# Altium PCB LAN7800_USB_Ethernet_RevA.PcbDoc
Units mm, origin at the board's own origin, x right, y up, seen from the top; angles counter-clockwise.
Board outline 70 x 34 mm, 4 copper layers (Top Layer, GND_1, GND_2, Bottom Layer), stack 1.51 mm thick; 48 components, 41 nets, 196 pads, 73 vias.
Unrouted connection lines stored in the file: 1.
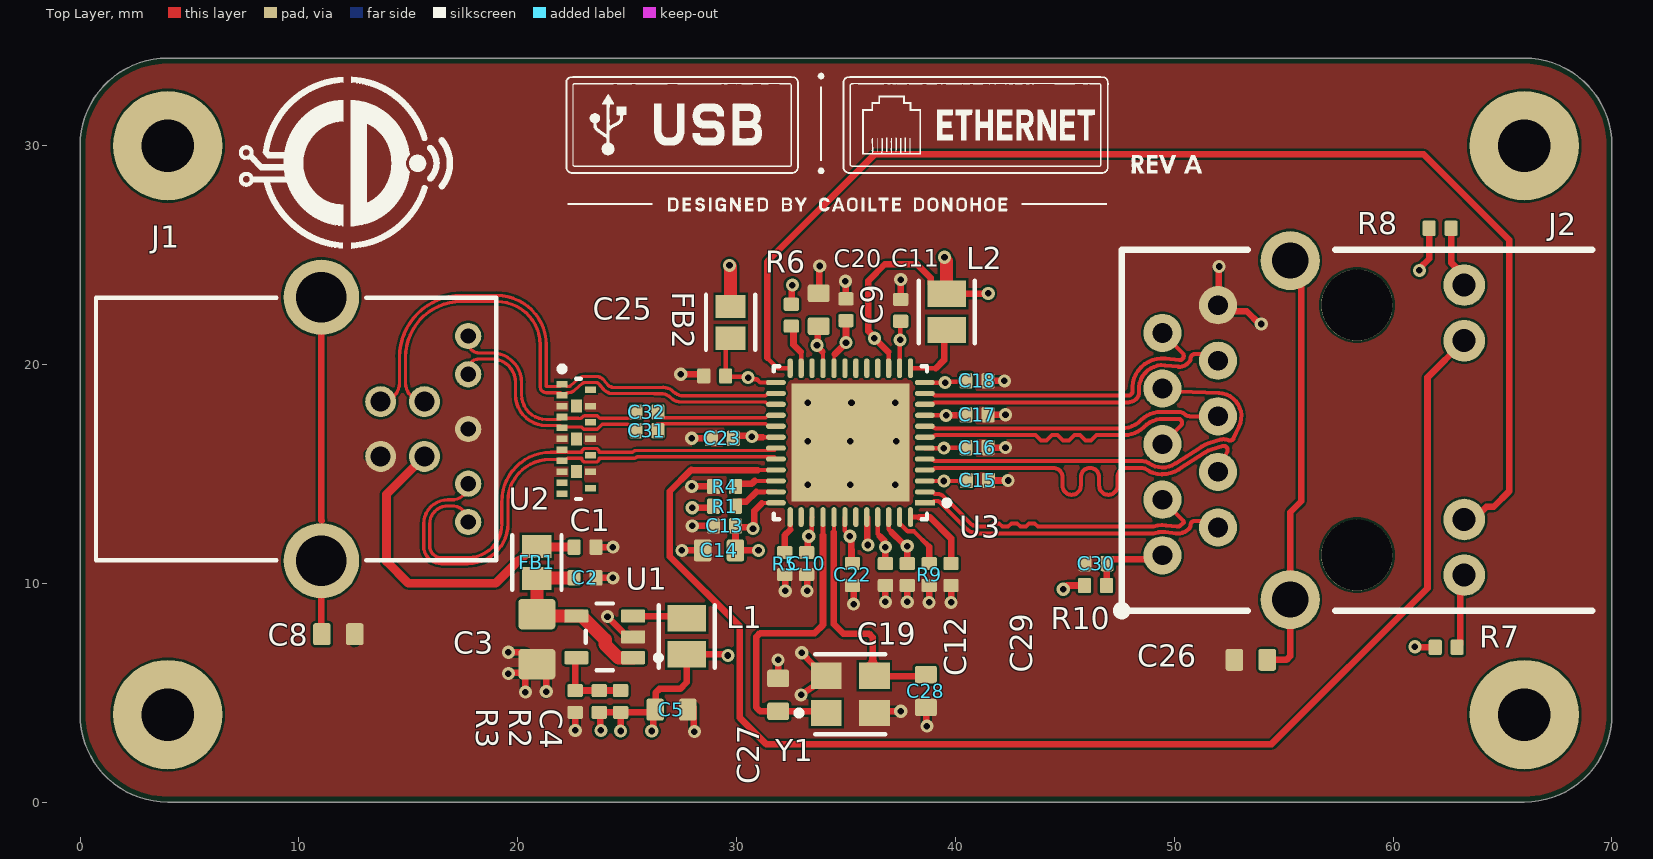
[diagram p0: Top Layer view]
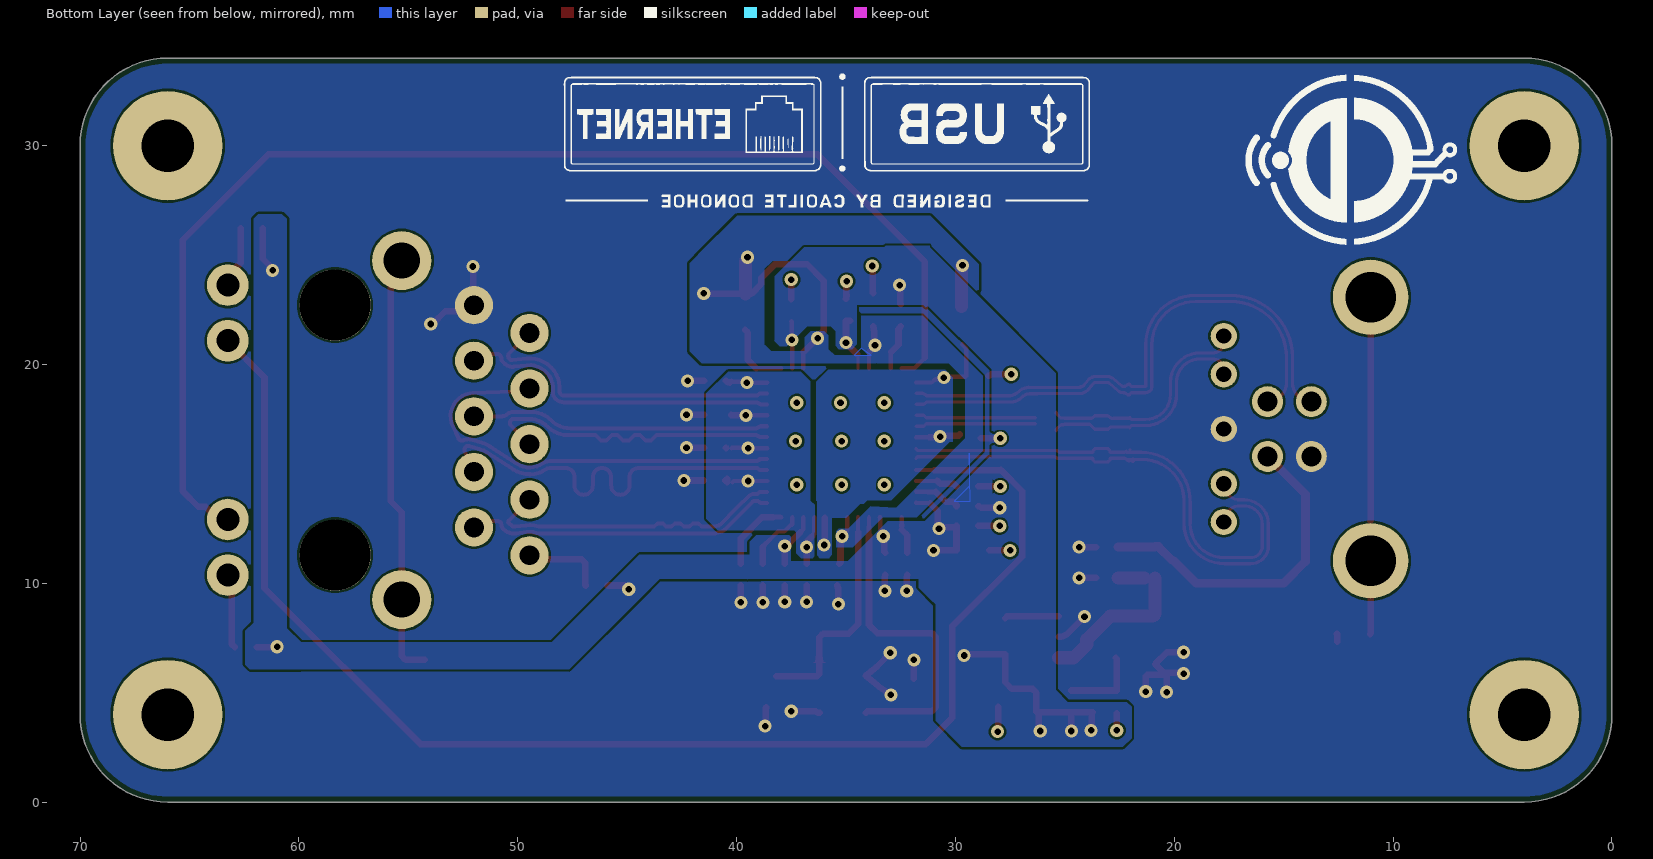
[diagram p1: Bottom Layer view, seen from below]
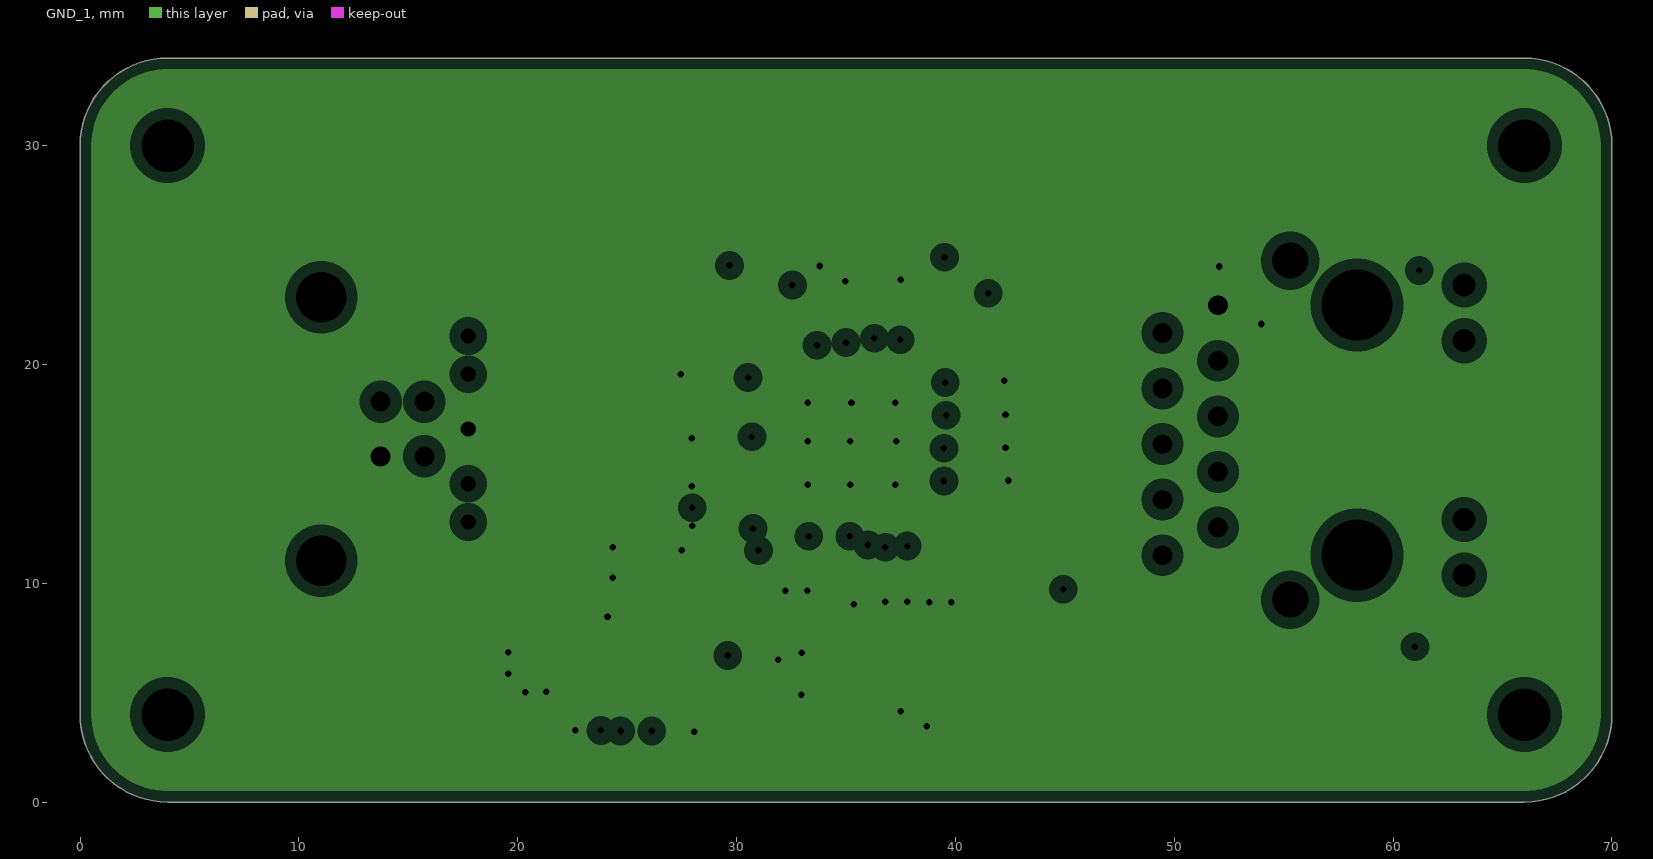
[diagram p2: GND_1, clearances drawn from the general rule]
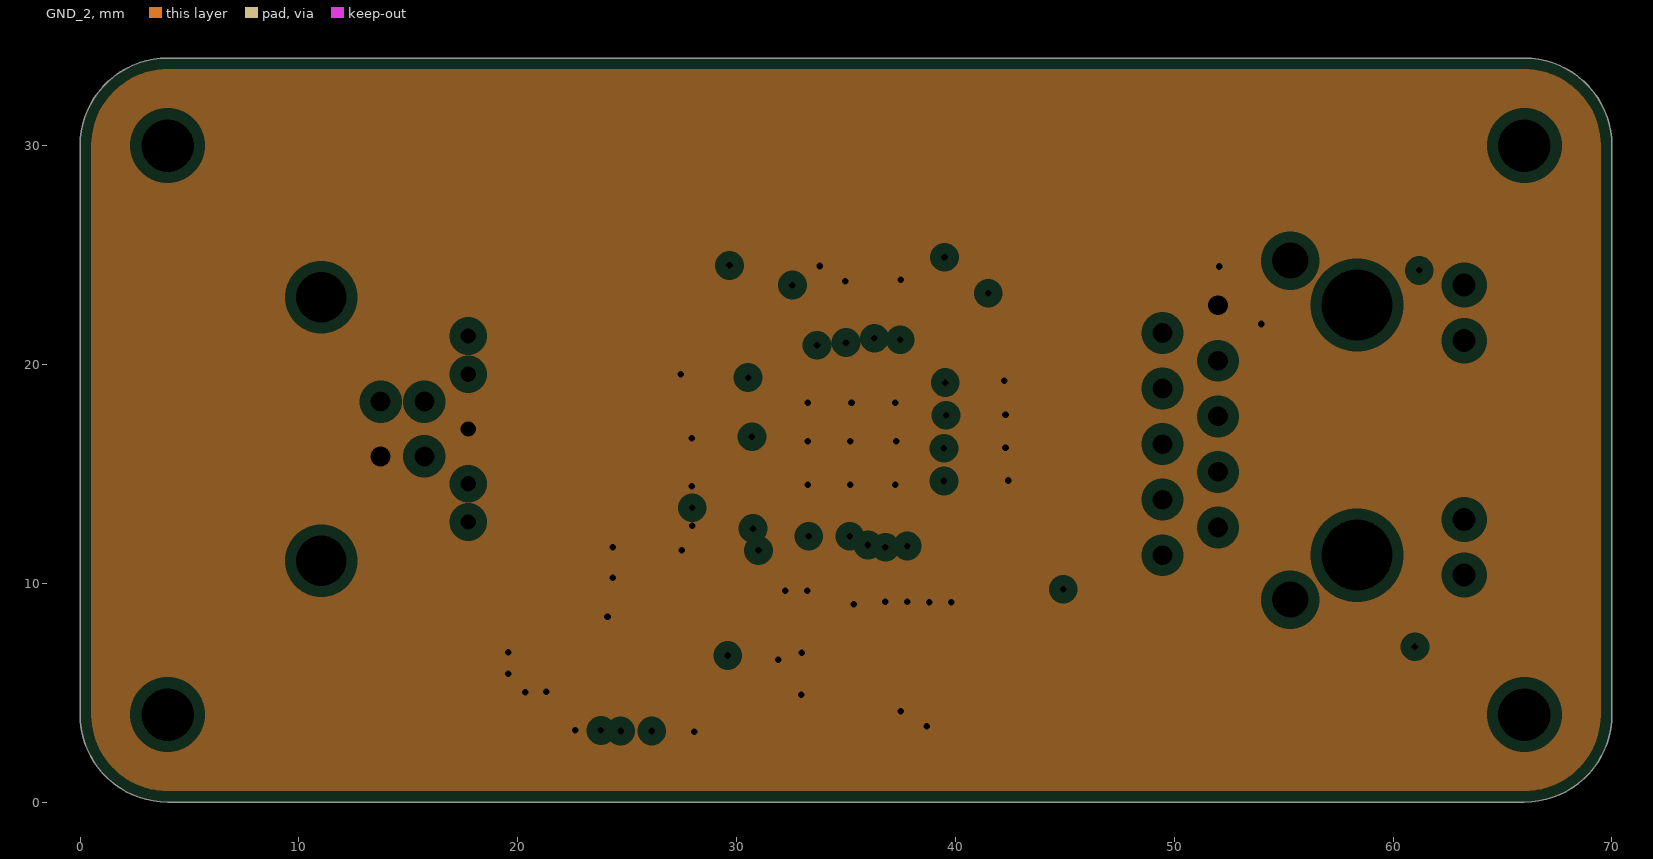
[diagram p3: GND_2, clearances drawn from the general rule]
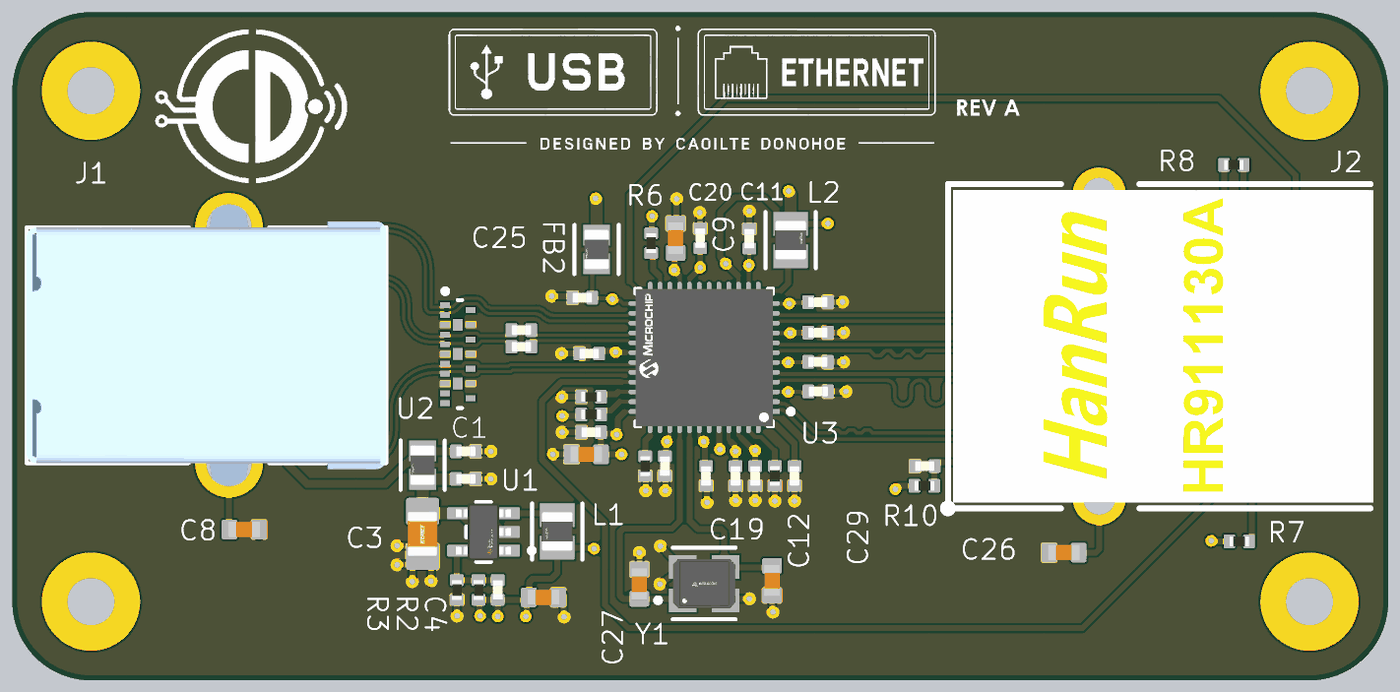
[diagram p4: 3D render of the assembled board from above, using the file's embedded part models]

## Layer stack, top to bottom
Top Solder: solder mask 0.01, Solder Resist, Dk 3.5
Top Layer: signal copper 0.035
Dielectric 2: prepreg 0.12, IS400, Dk 4.2
GND_1: plane copper 0.035, net GND
Dielectric 1: dielectric 1.13, IS400, Dk 4.4
GND_2: plane copper 0.035, net GND
Dielectric 3: prepreg 0.12, IS400, Dk 4.2
Bottom Layer: signal copper 0.035
Bottom Solder: solder mask 0.01, Solder Resist, Dk 3.5

## Board outline
0,4 0,30 cw(c4,30) 4,34 66,34 cw(c66,30) 70,30 70,4 cw(c66,4) 66,0 4,0 cw(c4,4)

## Design rules (kind name [scope] priority, off if disabled: settings)
BoardOutlineClearance [All] p1: gap=0.254 ignorepadtopadclearanceinfootprint=FALSE except(0: Arc-SplitContinuation Track-SplitContinuation SMDPad-SplitContinuation THPad-SplitContinuation Via-SplitContinuation Fill-SplitContinuation Poly-SplitContinuation Region-SplitContinuation Text-SplitContinuation)
Clearance CLEARANCE_USB_J1_BREAKOUT [InNetClass('USB2_HS') OR InNetClass('USB3_SS') vs IsPad And InComponent('U2')] p1: gap=0.08 ignorepadtopadclearanceinfootprint=FALSE
Clearance CLEARANCE_U2_USB_ESCAPE [InNetClass('USB3_SS') AND IsTrack vs InComponent('U2')] p2 off: gap=0.2 ignorepadtopadclearanceinfootprint=FALSE
Clearance CLEARANCE_SAME_DIFF_PAIR [All] p3 off: gap=0.127 ignorepadtopadclearanceinfootprint=FALSE
Clearance CLEARANCE_U2_PROTOTYPE [InComponent('U2') vs InComponent('U2')] p4 off: gap=0.1 ignorepadtopadclearanceinfootprint=FALSE
Clearance CLEARANCE_U3_FINE_PITCH [InComponent('U3') vs InComponent('U3')] p5 off: gap=0.15 ignorepadtopadclearanceinfootprint=FALSE
Clearance CLEARANCE_USB3_TO_OTHER_SIGNALS [InNetClass('USB3_SS') AND (IsTrack OR IsArc OR IsVia) vs Not InNetClass('USB3_SS') AND (IsTrack OR IsArc OR IsVia)] p6 off: gap=1.23 ignorepadtopadclearanceinfootprint=FALSE
Clearance CLEARANCE_ETH_BETWEEN_PAIRS [InDifferentialPairClass('ETH_DIFF') vs InDifferentialPairClass('ETH_DIFF')] p7 off: gap=0.635 ignorepadtopadclearanceinfootprint=FALSE
Clearance Clearance_1 [All] p8: gap=0.1 ignorepadtopadclearanceinfootprint=FALSE
DiffPairsRouting DP_USB2_D90 [InDifferentialPairClass('USB2_DIFF')] p1: maxlimit=0.127 minlimit=0.127 mostfreqgap=0.127 toplayer_minwidth=0.1 toplayer_maxwidth=0.246 toplayer_prefwidth=0.15 bottomlayer_minwidth=0.1 bottomlayer_maxwidth=0.246 bottomlayer_prefwidth=0.15 impedanceprofiledriven=TRUE impedanceprofileid={173104B4-F4B9-4A2C-8924-E43239866977} impedanceprofilevalue=90.000000 maxuncoupledlength=12.7
DiffPairsRouting DP_USB3_D90 [InDifferentialPairClass('USB3_DIFF')] p2: maxlimit=0.127 minlimit=0.127 mostfreqgap=0.127 toplayer_minwidth=0.1 toplayer_maxwidth=0.246 toplayer_prefwidth=0.15 bottomlayer_minwidth=0.1 bottomlayer_maxwidth=0.246 bottomlayer_prefwidth=0.15 impedanceprofiledriven=TRUE impedanceprofileid={173104B4-F4B9-4A2C-8924-E43239866977} impedanceprofilevalue=90.000000 maxuncoupledlength=12.7
DiffPairsRouting DP_ETH_D100 [InDifferentialPairClass('ETH_DIFF')] p3: maxlimit=0.127 minlimit=0.127 mostfreqgap=0.127 toplayer_minwidth=0.12 toplayer_maxwidth=0.184 toplayer_prefwidth=0.131 bottomlayer_minwidth=0.12 bottomlayer_maxwidth=0.184 bottomlayer_prefwidth=0.131 impedanceprofiledriven=TRUE impedanceprofileid={E3C815A3-BF4B-4A62-B495-158BF076C68E} impedanceprofilevalue=100.000000 maxuncoupledlength=0.127
HoleSize MIN_DRILLED_HOLE [All] p1: absolutevalues=TRUE maxlimit=6.35 minlimit=0.3 maxpercent=80.000 minpercent=20.000
MatchedLengths MATCH_ETH_BETWEEN_PAIRS [InDifferentialPairClass('ETH_DIFF')] p1: tolerance=10 checknetsindiffpair=FALSE checkdiffpairvsdiffpair=TRUE checkxsignals=TRUE checkothers=TRUE
MatchedLengths MATCH_ETH_WITHIN_PAIR [InDifferentialPairClass('ETH_DIFF')] p2: tolerance=1.27 checknetsindiffpair=TRUE checkdiffpairvsdiffpair=FALSE checkxsignals=FALSE checkothers=FALSE
MatchedLengths MATCH_USB3_WITHIN_PAIR [InDifferentialPairClass('USB3_DIFF')] p3: tolerance=1 checknetsindiffpair=TRUE checkdiffpairvsdiffpair=FALSE checkxsignals=FALSE checkothers=FALSE
MinimumAnnularRing MIN_ANNULAR_RING [All] p1: minimumring=0.15
MinimumSolderMaskSliver MIN_SOLDER_MASK_SLIVER [All] p1: minsoldermaskwidth=0.075
PlaneClearance [All] p1: clearance=0.508
PlaneConnect [All] p1: planeconnectstyle=Relief reliefexpansion=0.508 reliefentries=4 reliefconductorwidth=0.254 reliefairgap=0.254
PolygonConnect [All] p1: connectstyle=Direct reliefconductorwidth=0.254 reliefentries=4 polygonreliefangle="90 Angle" airgapwidth=0.254
RoutingLayers ROUTE_LAYER_USB3 [InNetClass('USB3_SS')] p1: top layer_v5=TRUE bottom layer_v5=FALSE
RoutingLayers ROUTE_LAYER_USB2 [InNetClass('USB2_HS')] p2: top layer_v5=TRUE bottom layer_v5=FALSE
RoutingLayers ROUTE_LAYER_ETH [InNetClass('ETH_MDI')] p3: top layer_v5=TRUE bottom layer_v5=FALSE
RoutingLayers ROUTE_LAYER_CLOCK [InNetClass('CLOCK_25MHZ')] p4: top layer_v5=TRUE bottom layer_v5=FALSE
RoutingLayers ROUTE_LAYER_GENERAL [All] p5: top layer_v5=TRUE bottom layer_v5=TRUE
RoutingVias VIA_POWER [InNetClass('POWER_VBUS') OR InNetClass('POWER_3V3') OR InNetClass('POWER_2V5') OR InNetClass('POWER_1V2')] p1: holewidth=0.4 width=0.8 viastyle="Through Hole" minholewidth=0.3 minwidth=0.6 maxholewidth=0.5 maxwidth=1
RoutingVias VIA_GENERAL [All] p2: holewidth=0.3 width=0.6 viastyle="Through Hole" minholewidth=0.3 minwidth=0.6 maxholewidth=0.3 maxwidth=0.6
SilkToSolderMaskClearance SILK_TO_MASK_CLEARANCE [All] p1: minsilkscreentomaskgap=0.1 clearancetoexposedcopper=TRUE
SolderMaskExpansion [All] p1: expansion=0.03 istentingtop=FALSE
SupplyNets "Schematic Supply Nets_8" [InNet('+3V3')] p1: voltage=0.000
SupplyNets "Schematic Supply Nets_7" [InNet('GNDE')] p2: voltage=0.000
SupplyNets "Schematic Supply Nets_6" [InNet('GNDU')] p3: voltage=0.000
SupplyNets "Schematic Supply Nets_5" [InNet('+1V2')] p4: voltage=0.000
SupplyNets "Schematic Supply Nets_4" [InNet('VBUSF')] p5: voltage=0.000
SupplyNets "Schematic Supply Nets_3" [InNet('GND')] p6: voltage=0.000
SupplyNets "Schematic Supply Nets_2" [InNet('+2V5')] p7: voltage=0.000
SupplyNets "Schematic Supply Nets_1" [InNet('+1V2A')] p8: voltage=0.000
SupplyNets "Schematic Supply Nets" [InNet('VBUS')] p9: voltage=0.000
Width WIDTH_LOW_CURRENT_SIGNALS [InNetClass('LOW_CURRENT_SIGNALS')] p1: maxlimit=0.3 minlimit=0.15 preferedwidth=0.2
Width WIDTH_3V3 [InNetClass('POWER_3V3')] p2: maxlimit=0.6 minlimit=0.15 preferedwidth=0.3 minimp=50.000000 maximp=50.000000 favimp=50.000000
Width WIDTH_SWITCH_NODES [InNetClass('SWITCH_NODES')] p3: maxlimit=1 minlimit=0.4 preferedwidth=0.6
Width WIDTH_VBUS [InNetClass('POWER_VBUS')] p4: maxlimit=1 minlimit=0.4 preferedwidth=0.6
Width WIDTH_1V2 [All] p5: maxlimit=1 minlimit=0.15 preferedwidth=0.2 minimp=50.000000 maximp=50.000000 favimp=50.000000
Width WIDTH_2V5 [InNetClass('POWER_2V5')] p6: maxlimit=0.3 minlimit=0.15 preferedwidth=0.2 minimp=50.000000 maximp=50.000000 favimp=50.000000
Width [All] p7: maxlimit=1 minlimit=0.15 preferedwidth=0.2 minimp=50.000000 maximp=50.000000 favimp=50.000000
23 further rules are at their usual default settings.

## Classes and differential pairs
differential pair class USB3_DIFF: USB3_RX USB3_TX USB3_TX_C
differential pair class USB2_DIFF: USB_D
net class LOW_CURRENT_SIGNALS: FB LED2 LED3 NetJ2_11 NetJ2_14 REF_FILT REF_REXT RESET SW VBUSDET VCC
net class POWER_VBUS: VBUS VBUSF
differential pair class ETH_DIFF: MDI_TR0 MDI_TR1 MDI_TR2 MDI_TR3
net class POWER_1V2: +1V2 +1V2A
net class POWER_2V5: +2V5
net class POWER_3V3: +3V3 VBUS VBUSF
net class CLOCK_25MHZ: XI XO
net class ETH_MDI: MDI_TR0_N MDI_TR0_P MDI_TR1_N MDI_TR1_P MDI_TR2_N MDI_TR2_P MDI_TR3_N MDI_TR3_P
net class USB3_SS: USB3_RX_N USB3_RX_P USB3_TX_C_N USB3_TX_C_P USB3_TX_N USB3_TX_P
net class USB2_HS: USB_D_N USB_D_P
component class 02_LAN7800_Controller: C9 C10 C11 C12 C13 C14 C16 C17 C18 C19 C20 C22 C23 C25 C26 C27 C28 C29 C30 C31 C32 FB2 J2 L2 R1 R4 R5 R6 R7 R8 R9 R10 U3 Y1
component class 01_USB_B_and_Power: C1 C2 C3 C4 C5 C8 FB1 J1 L1 R2 R3 U1 U2
differential pair USB3_RX: +USB3_RX_P -USB3_RX_N
differential pair USB3_TX: +USB3_TX_P -USB3_TX_N
differential pair USB_D: +USB_D_P -USB_D_N
differential pair USB3_TX_C: +USB3_TX_C_P -USB3_TX_C_N
differential pair D_MDI_TR0: +MDI_TR0_P -MDI_TR0_N
differential pair D_MDI_TR1: +MDI_TR1_P -MDI_TR1_N
differential pair D_MDI_TR2: +MDI_TR2_P -MDI_TR2_N
differential pair D_MDI_TR3: +MDI_TR3_P -MDI_TR3_N
differential pair MDI_TR3: +MDI_TR3_P -MDI_TR3_N
differential pair MDI_TR2: +MDI_TR2_P -MDI_TR2_N
differential pair MDI_TR1: +MDI_TR1_P -MDI_TR1_N
differential pair MDI_TR0: +MDI_TR0_P -MDI_TR0_N

## Components (designator, comment, footprint, x,y, rotation, side; value= is the part's Value field where it differs from the comment)
C1 "1uF" CAP_0402 23.075,11.65 r180 top
C2 "1uF" CAP_0402 23.075,10.25 r180 top
C3 "22uF" CAP_0805 20.875,7.45 r90 top
C4 "12pF" CAP_0402 24.7,4.6 r270 top
C5 "C0603" CAP_0603 27.025,4.225 r180 top
C8 "220pF" CAP_0603 11.8,7.675 r0 top
C9 "100nF" CAP_0402 35,22.5 r270 top
C10 "100nF" CAP_0402 33.2,10.9 r90 top
C11 "100nF" CAP_0402 37.5,22.475 r270 top
C12 "100nF" CAP_0402 37.8,10.4 r90 top
C13 "100nF" CAP_0402 29.45,12.625 r0 top
C14 "22uF" CAP_0603 29.2,11.5 r0 top
C15 "100nF" CAP_0402 41.01,14.698 r180 top
C16 "100nF" CAP_0402 40.99,16.2 r180 top
C17 "100nF" CAP_0402 40.99,17.7 r180 top
C18 "100nF" CAP_0402 40.99,19.25 r180 top
C19 "100nF" CAP_0402 36.8,10.4 r90 top
C20 "22uF" CAP_0603 33.75,22.5 r270 top
C22 "100nF" CAP_0402 35.3,10.4 r90 top
C23 "100nF" CAP_0402 29.35,16.625 r0 top
C25 "1uF" CAP_0402 29,19.475 r0 top
C26 "220pF" CAP_0603 53.5,6.5 r0 top
C27 "15pF" CAP_0603 31.9,4.9 r270 top
C28 "15pF" CAP_0603 38.65,5.075 r90 top
C29 "1uF" CAP_0402 39.8,10.4 r90 top
C30 "1uF" CAP_0402 46.425,10.9 r0 top
C31 "100nF" CAP_0402 25.9,16.975 r180 top
C32 "100nF" CAP_0402 25.9,17.825 r180 top
FB1 "BLM21PG221SN1D" FP-BLM21-0_2-t0_85-e0_5-IPC_C 20.875,10.95 r270 top
FB2 "220R@100MHz" FP-BLM21-0_2-t0_85-e0_5-IPC_C 29.725,21.925 r270 top
J1 "692221030100" 692221030100 9.875,17.05 r270 top
J2 "HR911130A" HR911130A 58.35,17 r270 top
L1 "LQM2MPN4R7MG0L" FP-LQM2MPN_G0-IPC_B 27.725,7.575 r270 top
L2 "LQM2MPN4R7MG0L" FP-LQM2MPN_G0-IPC_B 39.6,22.4 r90 top
R1 "12k" RES_0402 29.45,13.525 r180 top
R2 "53k6" RES_0402 23.725,4.6 r270 top
R3 "12k" RES_0402 22.625,4.6 r90 top
R4 "12k" RES_0402 29.45,14.425 r0 top
R5 "12k" RES_0402 32.2,10.9 r90 top
R6 "12k" RES_0402 32.5,22.25 r270 top
R7 "1k" RES_0402 62.425,7.075 r0 top
R8 "1k" RES_0402 62.15,26.225 r0 top
R9 "2k" RES_0402 38.8,10.4 r90 top
R10 "0R" RES_0402 46.4,9.9 r180 top
U1 "TLV62568DBVR" FP-DBV0005A-MFG 23.975,7.55 r180 top
U2 "ESD7008MUTAG" ONSC-UDFN-18-517BV_V 22.675,16.6 r0 top
U3 "LAN7800-I/Y9X" FP-48SQFN-5304-7x7B-IPC_B 35.2,16.426 r180 top
Y1 "ABM8G-25.000MHZ-B4Y-T" FP-ABM8G-MFG 35.2,4.925 r0 top

## Footprints (in the part's own frame and the unit in brackets; to place one, negate y for a bottom-side part, rotate by r counter-clockwise, add the part's x,y. Pads: shape width x height; smd on the part's side, far side on the other; paste and mask are expansions set on the pad)
692221030100 [mm] "USB 3.0 Type B Horizontal"
  round 1.42 hole 0.92: 1(1.25,5.86) 2(-1.25,5.86) 3(-1.25,3.86) 4(1.25,3.86)
  round 1.2 hole 0.7: 5(-4.25,7.86) 6(-2.5,7.86) 7(0,7.86) 8(2.5,7.86) 9(4.25,7.86)
  round 3.45 hole 2.3: Shell(-6.02,1.15) Shell(6.02,1.15)
  silkscreen extent -6,-9.15 6,9.15, body extent -7.2,-9.15 7.2,9.15, height 12.95
CAP_0402 [mm]
  rrect25% 0.6x0.7 smd: 1(-0.5,0) 2(0.5,0)
  body extent -0.5,-0.26 0.5,0.26, height 0.37
CAP_0603 [mm]
  rrect25% 0.8x1 smd: 1(-0.75,0) 2(0.75,0)
  body extent -0.8,-0.4 0.8,0.4, height 0.51
CAP_0805 [mm]
  rrect25% 1.4x1.7 smd: 1(-1.143,0) 2(1.143,0)
  body extent -1.15,-0.76 1.15,0.79, height 1.01
FP-48SQFN-5304-7x7B-IPC_B [mm]
  rect 0.91x0.239 smd paste+0 mask+0: 1(-3.401,2.75)
  rrect100% 0.91x0.239 smd paste+0 mask+0: 2(-3.401,2.25) 3(-3.401,1.75) 4(-3.401,1.25) 5(-3.401,0.75) 6(-3.401,0.25) 7(-3.401,-0.25) 8(-3.401,-0.75) 9(-3.401,-1.25) 10(-3.401,-1.75) 11(-3.401,-2.25) 12(-3.401,-2.75) 25(3.401,-2.75) 26(3.401,-2.25) 27(3.401,-1.75) 28(3.401,-1.25) 29(3.401,-0.75) 30(3.401,-0.25) 31(3.401,0.25) 32(3.401,0.75) 33(3.401,1.25) 34(3.401,1.75) 35(3.401,2.25) 36(3.401,2.75)
  rrect100% 0.239x0.91 smd paste+0 mask+0: 13(-2.75,-3.401) 14(-2.25,-3.401) 15(-1.75,-3.401) 16(-1.25,-3.401) 17(-0.75,-3.401) 18(-0.25,-3.401) 19(0.25,-3.401) 20(0.75,-3.401) 21(1.25,-3.401) 22(1.75,-3.401) 23(2.25,-3.401) 24(2.75,-3.401) 37(2.75,3.401) 38(2.25,3.401) 39(1.75,3.401) 40(1.25,3.401) 41(0.75,3.401) 42(0.25,3.401) 43(-0.25,3.401) 44(-0.75,3.401) 45(-1.25,3.401) 46(-1.75,3.401) 47(-2.25,3.401) 48(-2.75,3.401)
  rect 5.4x5.4 smd paste-1000 mask+0: 49(0,0)
  silkscreen extent -4.53,-3.5 3.5,3.5, body extent -4.11,-4.11 4.11,4.11, height 0.25
FP-ABM8G-MFG [mm]
  rect 1.4x1.2 smd paste+0 mask+0: 1(-1.1,-0.85) 2(1.1,-0.85) 3(1.1,0.85) 4(-1.1,0.85)
  silkscreen extent -2.47,-1.83 1.6,1.83, body extent -1.9,-1.55 1.9,1.55, height 0.25
FP-BLM21-0_2-t0_85-e0_5-IPC_C [mm]
  rect 1.055x1.356 smd paste+0 mask+0: 1(-0.726,0) 2(0.726,0)
  silkscreen extent -1.25,-1.12 1.25,1.12, body extent -1.35,-0.82 1.35,0.82, height 0.25
FP-DBV0005A-MFG [mm]
  rrect17% 1.1x0.6 smd paste+0 mask+0: 1(-1.3,0.95) 2(-1.3,0) 3(-1.3,-0.95) 4(1.3,-0.95) 5(1.3,0.95)
  silkscreen extent -2.58,-1.53 0.87,1.53, body extent -1.95,-1.78 1.95,1.78, height 0.25
FP-LQM2MPN_G0-IPC_B [mm]
  rect 1.206x1.758 smd paste+0 mask+0: 1(-0.826,0) 2(0.826,0)
  silkscreen extent -1.43,-1.28 1.43,1.28, body extent -1.68,-1.13 1.68,1.13, height 0.25
HR911130A [mm]
  round 1.75 hole 0.9: 1(5.72,-8.89) 2(4.45,-6.35) 3(3.18,-8.89) 4(1.91,-6.35) 5(0.64,-8.89) 6(-0.63,-6.35) 7(-1.9,-8.89) 8(-3.17,-6.35) 9(-4.44,-8.89) 10(-5.71,-6.35)
  round 1.9 hole 1.05: 11(6.625,4.9) 12(4.085,4.9) 13(-4.085,4.9) 14(-6.625,4.9)
  round 3.25 hole 3.25 unplated: MH(-5.715,0) MH(5.715,0)
  round 2.7 hole 1.65: SH(-7.745,-3.05) SH(7.745,-3.05)
  silkscreen extent -8.25,-10.95 8.45,10.75, body extent -7.94,-10.49 7.94,10.91, height 13.51
ONSC-UDFN-18-517BV_V [mm] "SON, 18-Leads, Body 5.5x1.5mm"
  rect 0.5x0.3 smd: 1(-0.65,2.5) 2(-0.65,2) 3(-0.65,1.5) 4(-0.65,1) 5(-0.65,0.5) 6(-0.65,0) 7(-0.65,-0.5) 8(-0.65,-1) 9(-0.65,-1.5) 10(-0.65,-2) 11(-0.65,-2.5) 12(0.65,-2.25) 13(0.65,-1.5) 14(0.65,-0.75) 15(0.65,0) 16(0.65,0.75) 17(0.65,1.5) 18(0.65,2.25)
  rect 0.5x0.6 smd: 19(0,1.5) 20(0,0) 21(0,-1.5)
  silkscreen extent -0.77,-2.75 0.21,3.32, body extent -0.75,-2.75 0.75,2.75, height 0.55
RES_0402 [mm]
  rrect25% 0.6x0.7 smd: 1(-0.5,0) 2(0.5,0)
  body extent -0.5,-0.25 0.5,0.25, height 0.3

## Part data
C1 C2 C4 C9 C10 C11 C12 C13 C15 C16 C17 C18 C19 C22 C23 C25 C29 C30 C31 C32: library part CAP_0402, "Capacitor SMD 0402"
C3: library part CAP_0805, "Capacitor SMD 0805"
C5 C8 C14 C20 C26 C27 C28: library part CAP_0603, "Capacitor SMD 0603"
FB1 FB2: library part CMP-0686-00610-3, "Chip Ferrite Bead, 0805, 220Ω @ 100MHz, 0.045Ω, 25%, 2A", Case Code (Imperial)=0805, Case Code (Metric)=2012, Current=2A, DC Resistance (DCR)=45mR, Frequency=100MHz, Max Operating Temperature=125°C, Min Operating Temperature=-55°C, Package Quantity=1, Tolerance=25%, Case/Package=0805, Contact Plating=Tin, Core Material=Ferrite, Current Rating=2A, DC Current=2A, DC Resistance-Max=45mR, Depth=1.25mm, Height=0.85mm, Impedance=220R, Lead Free="Lead Free", Length=2mm, Material=Ferrite, Max Current Rating=2A, Max DC Current=2A, Military Standard=Not, Number of Circuits=1, Number of Lines=1, Number of Pins=2, Packaging="Tape and Reel", Radiation Hardening=No, REACH SVHC="No SVHC", RoHS Compliant=Yes, Series=BLM21P, Shielding=Unshielded, Termination=SMD/SMT, Test Frequency=100MHz, Width=1.25mm
J1: library part CMP-1502-03224-3, "Conn USB 3.0 Type B RCP 9 POS (1.75mm/2.5)mm/1.25mm Solder RA Thru-Hole 9 Terminal 1 Port Tray", Color=Blue, Contact Resistance=50mΩ, Current Rating=250mA, Flammability Rating="UL94 V-0", Insulation Resistance=100MΩ, Max Operating Temperature=85°C, Min Operating Temperature=-20°C, Operating Supply Voltage=30V, Connector Type=USB, Contact Material="Nickel, Tin", Contact Plating=Gold, Features=Shielded, Gender=Receptacle, Height=13.05mm, Lead Free="Lead Free", Length=12mm, Mount="Horizontal, PCB, Through Hole", Number Of Contacts=9, Number of Pins=9, Number of Ports=1, Orientation=Horizontal, RoHS=Compliant, Termination="Through Hole", USB Standard="USB 3.0", Voltage Rating=30V, Voltage Rating (AC)=30V, Width=18.3mm
J2: "100/1000Base-T Magnetics Single-Port RJ45 Connector with Integrated Magnetics and LEDs", Manufacturer=Hanrun, Manufacturer Part Number=HR911130A
L1 L2: library part CMP-06042-016483-1, "Multilayer Type Inductor for Power Lines, 0806 (2016), 4.7μH, 20%, 0.175Ω, 1.1A", Case Code (Imperial)=0806, Case Code (Metric)=2016, Case/Package=0805, Current Rating=1.1A, DC Resistance (DCR)=175mR, Inductance=4.7uH, Max Operating Temperature=125°C, Min Operating Temperature=-55°C, Package Quantity=3000, Self Resonant Frequency=20MHz, Test Frequency=1MHz, Tolerance=20%, Core Material=Ferrite, DC Current=1.1A, Depth=1.75mm, Height=0.9mm, Height - Seated (Max)=0.039inch, Length=0.079inch, Max DC Current=1.1A, Military Standard=Not, Mount="Surface Mount", Packaging="Tape and Reel", RoHS Compliant=Yes, Shielding=Shielded, Termination=SMD/SMT, Weight=0.000353oz, Width=0.049inch
R1 R2 R3 R4 R5 R6 R7 R8 R9 R10: library part RES_0402, "Resistor SMD 0402"
U1: library part CMP-04918-000009-1, "IC REG BUCK ADJ 1A SOT23-5", Manufacturer="Texas Instruments", Max Junction Temp=+125°C, Max Supply Voltage=5.5V, Min Supply Voltage=2.5V, Nominal Supply Current=35uA, Output Current=1A, Output Voltage=0.6-5.5V, Package=DBV0005A, Switching Frequency=1.5MHz, Temperature="-40°C to +125°C", Temperature Range Low=-40°C, Automotive=No, Category=IC, ComponentLink2Description=Datasheet, ComponentLink2URL=http://www.ti.com/lit/ds/symlink/tlv62568.pdf, Device Class L1="Integrated Circuits (ICs)", Device Class L2="Power Management ICs", Device Class L3="Voltage Regulators - Switching", Digikey Description="IC REG BUCK ADJ 1A SOT23-5", Height=1.45mm, Lead Free=Yes, Manufacturer Part Number=TLV62568DBVR, Max Duty Cycle=100%, Mouser Description="1-A High Efficiency Synchronous Buck Converter, SMD, 5-pin SOT-23, T/R 3k", Number of Outputs=1, Octopart=https://octopart.com/tlv62568dbvr-texas+instruments-76926199, Output Type=AdjustableProgrammable, RoHS=TRUE, Standoff Height=0mm, Switching Topology=Buck, Temperature Range High=+125°C
U2: library part CMP-1063-00247-1, "Transient Voltage Suppressor, Low Capacitance ESD Protection for High Speed Data, 18-Pin UDFN, Pb-Free, Tape and Reel", Manufacturer="On Semiconductor", ComponentLink1Description="Manufacturer URL", ComponentLink1URL=http://www.onsemi.com/, ComponentLink2Description=Datasheet, ComponentLink2URL=http://www.onsemi.cn/pub_link/Collateral/ESD7008-D.PDF, ComponentLink3Description="Package Specification", ComponentLink3URL=http://www.onsemi.cn/pub_link/Collateral/517BV.PDF, DatasheetVersion="Rev. 4", Direction=Bidirectional, IR Max (uA)=1, Mounting Technology="Surface Mount", Number of Lines=8, PackageDescription="18-Pin Small Outline No-Lead, Body 5.5 x 1.5 mm", PackageReference=UDFN-18-517BV, PackageVersion="Rev. A, 12/2012", Packing="Tape and Reel", PartNumber=ESD7008MUTAG, RoHS=Pb-Free, V(BR) Min (V)=5.5, VRWM Max (V)=5
U3: library part CMP-06298-000014-1, "IC ETHERNET CTLR USB 48SQFN", Max Operating Temperature=85°C, Min Operating Temperature=-40°C, Operating Supply Current=4mA, Packaging=Tray
Y1: library part CMP-27762-000021-2, "Crystal 25MHz ±30ppm (Tol) ±30ppm (Stability) 10pF FUND 60Ω 4-Pin SMD T/R", Case/Package=CSMD, ESR (Equivalent Series Resistance)=60R, Frequency=25MHz, Frequency Stability=30ppm, Load Capacitance=10pF, Max Operating Temperature=70°C, Min Operating Temperature=-20°C, Operating Frequency="25 MHz", Package Quantity=1000, Depth=2.5mm, Frequency Tolerance=30ppm, Height=0.039inch, Lead Free="Lead Free", Length=3.2mm, Mount="Surface Mount", Number of Pins=4, Packaging="Tape and Reel", Series=ABM8G, Series Resistance=60R, Termination=SMD/SMT, Tolerance=30ppm, Width=0.098inch

## Free pads (board coordinates)
  round 5 hole 2.4: 1(4,30) 2(4,4) 3(66,30) 4(66,4)

## Via types
v1: diameter 0.6, hole 0.3, Top Layer to Bottom Layer, 73 vias

## Nets (pads, with @x,y where several pads share a name; then routed paths per layer and width w, separated by ;. In a path a pad name is that pad's centre, name@x,y a point inside that pad or via, vN(x,y) a via of type N, cw(c..) or ccw(c..) an arc to the next point about the centre after c; other vN are vias at no path point)
+1V2: C20.2 C22.2 FB2.1 L2.2 U3.15 U3.21 U3.42 | length 18.8
  Top Layer w0.2: 33.92,20.58 33.95,20.55 U3.21 ; U3.42 34.95,12.4 35.175,12.175 v1(35.175,12.15) ; 36.92,20.58 36.95,20.55 U3.15
  Top Layer w0.3: C20.2 33.7,21.5 33.7,20.8 33.92,20.58 ; v1(35.175,12.15) 35.232,12.093 35.232,11.543 35.25,11.525 35.25,10.95 C22.2 ; 36.92,20.58 v1(36.3,21.2) 36.3,21.251 36.025,21.526 36.025,23.825 36.775,24.575 38.251,24.575 38.871,23.955 38.871,23.679 39.324,23.226 L2.2 41.476,23.226 v1(41.5,23.25) ; v1(39.5,24.9) 39.5,24.819 v1@39.6,24.719
  Top Layer w0.6: v1(29.675,24.525) 29.725,24.475 FB2.1 ; L2.2 v1@39.6,24.719
  other v1: 33.675,20.875
+1V2A: C23.2 C25.2 FB2.2 U3.25 U3.30 U3.44 | length 7.3
  Top Layer w0.2: FB2.2@29.7,20.924 29.5,20.724 C25.2 29.538,19.437 30.488,19.437 v1(30.525,19.4) 30.602,19.323 30.927,19.323 31.075,19.175 31.076,19.176 U3.25 ; 31.2,16.675 U3.30 U3.30
  Top Layer w0.3: C23.2@29.8,16.8 29.85,16.75 30.65,16.75 v1(30.7,16.7) 30.725,16.675 31.2,16.675 ; U3.44@35.975,13 35.975,11.775 v1(36,11.75)
+2V5: C15.2 C16.2 C17.2 C18.2 C19.2 U3.3 U3.6 U3.9 U3.12 U3.45 | length 9.3
  Top Layer w0.2: U3.45 36.45,12.25 36.55,12.15 ; U3.3 v1@39.249,14.676 ; U3.6 38.602,16.175 v1(39.475,16.175) 39.488,16.188 40.208,16.188 C16.2@40.22,16.175 ; U3.9@38.602,17.676 v1@39.574,17.676 ; U3.12 38.609,19.169 v1(39.531,19.169) 39.572,19.209 40.067,19.209 40.204,19.209 C18.2@40.245,19.25 ; v1@39.25,14.675 v1@39.249,14.676 ; 40.188,14.624 40.137,14.675 v1(39.475,14.675) v1(39.475,14.675) v1@39.249,14.676
  Top Layer w0.3: 36.55,12.15 36.65,12.05 36.743,11.957 36.743,11.707 v1(36.8,11.65) C19.2 ; v1(39.575,17.675) 39.588,17.687 40.233,17.687 C17.2@40.245,17.7 ; C18.2@40.312,19.176 ccw(c40.312,19.428) C18.2 ; C15.2@40.433,14.624 C15.2@40.433,14.774 ; C15.2@40.435,14.773 C15.2 ; C16.2@40.465,16.175 C16.2
+3V3: C4.2 C5.2 C9.2 C10.2 C11.2 C12.2 C13.2 C14.2 L1.2 R1.2 R2.2 R6.1 R7.1 R8.1 R10.2 U3.14 U3.20 U3.36 U3.39 U3.46 | length 30.7
  Top Layer w0.15: U3.20 34.45,20.429 34.48,20.459
  Top Layer w0.2: 31.15,13.65 31.169,13.669 31.791,13.669 U3.36 ; v1(33.3,12.15) 33.3,12.258 33.442,12.401 33.442,13.017 U3.39 ; U3.46 36.95,12.466 37.083,12.333 ; U3.14 37.458,19.835 37.458,21.108 37.487,21.137 37.487,21.962 C11.2
  Top Layer w0.3: R2.2 C5.2@26.275,4.1 ; R2.2@23.762,4.037 23.762,3.312 v1(23.8,3.275) ; v1(24.7,3.25) 24.7,3.275 C4.2@24.7,4.075 ; v1(26.125,3.25) 26.182,3.307 26.182,4.082 C5.2@26.157,4.107 ; C5.2@26.3,4.125 26.3,4.999 26.476,5.175 27.425,5.175 27.725,5.475 L1.2 29.551,6.749 v1(29.6,6.7) ; v1(27.975,13.45) 28.8,13.45 R1.2 ; v1(31,11.5) C14.2 C13.2 30.018,12.557 30.693,12.557 v1(30.75,12.5) 30.807,12.557 30.807,13.307 31.15,13.65 ; R6.1 32.525,22.775 32.525,23.6 v1(32.55,23.625) ; C10.2 33.25,11.45 33.25,12.1 v1(33.3,12.15) ; 34.48,20.459 35,20.979 v1(35,21) C9.2 C9.2@34.8,21.992 ; 37.083,12.333 37.566,11.85 37.569,11.85 37.719,11.7 v1(37.8,11.7) C12.2 ; v1(44.925,9.725) 45.1,9.9 R10.2 ; v1(61,7.1) 61.025,7.075 R7.1 ; v1(61.2,24.3) 61.2,24.381 61.65,24.831 R8.1
  other v1: 37.475,21.125
FB: C4.1 R2.1 R3.2 U1.5 | length 3.6
  Top Layer w0.3: U1.5 22.625,6.55 R3.2 C4.1
GND: C1.1 C2.1 C3.1 C5.1 C8.2 C9.1 C10.1 C11.1 C12.1 C13.1 C14.1 C15.1 C16.1 C17.1 C18.1 C19.1 C20.1 C22.1 C23.1 C25.1 C26.1 C27.1 C28.1 C29.1 C30.1 J1.4 J1.7 J2.10 R3.1 R4.1 R5.1 R9.1 U1.2 U2.3 U2.6 U2.9 U2.13 U2.15 U2.17 U3.49 Y1.2 Y1.4 | length 38.3
  Top Layer w0.3: C8.2@12.554,7.325 C8.2 C8.2@12.562,7.688 ; J1.4@13.209,15.777 J1.4@13.209,15.891 ; J1.7@17.718,17.067 J1.7 J1.7@17.735,16.816 ; v1(19.575,5.875) 19.603,5.903 C3.1@20.471,5.903 ; v1(19.575,6.85) 19.583,6.842 20.34,6.842 C3.1 C3.1@20.471,5.903 ; v1(20.35,5.025) 20.35,5.782 C3.1@20.471,5.903 ; C3.1@20.393,5.825 21.234,5.825 21.3,5.759 v1(21.3,5.05) 21.275,5.025 v1@21.275,4.975 ; v1(22.625,3.275) R3.1@22.625,4.05 ; C2.1 v1(24.35,10.25) ; C1.1 v1(24.35,11.65) ; v1(24.1,8.475) 24.848,7.727 ccw(c25.275,8.154) U1.2 ; v1(27.45,19.55) 28.35,19.55 C25.1 ; v1(27.5,11.5) C14.1 ; v1(27.95,14.425) R4.1 ; v1(27.95,16.625) C23.1 ; v1(27.975,12.625) C13.1 ; C5.1@28.05,4.357 28.05,3.25 v1(28.075,3.225) ; C27.1 v1(31.9,6.5) ; R5.1 32.225,10.25 v1(32.225,9.65) ; v1(32.95,4.9) 33.55,5.325 Y1.4 33.55,6.225 v1(32.975,6.825) ; C10.1 33.225,10.25 v1(33.225,9.65) ; C20.1 33.775,23.275 33.775,24.475 v1(33.8,24.5) ; C9.1@34.975,23.15 C9.1 34.988,23.012 34.988,23.788 v1(34.975,23.8) ; v1(35.35,9.05) 35.35,9.75 C22.1@35.4,9.9 ; Y1.2@36.2,4.075 Y1.2 36.375,4.15 v1(37.5,4.15) ; v1(36.8,9.15) C19.1 ; C11.1 v1(37.5,23.875) ; v1(37.8,9.15) C12.1 ; C28.1 38.675,4.3 38.675,3.5 v1(38.7,3.475) ; v1(38.8,9.125) R9.1 ; v1(39.8,9.125) C29.1 ; C16.1 v1(42.29,16.2) ; C17.1 v1(42.29,17.7) ; C18.1 v1(42.24,19.25) ; C15.1 v1(42.41,14.698) ; v1(52.05,24.475) 52.025,24.45 52.025,22.735 J2.10 52.277,22.433 53.317,22.433 53.9,21.85 v1(53.975,21.85) 53.925,21.9 v1@53.9,21.9
  other v1: 33.25,14.5 35.2,14.5 37.25,14.5 33.25,16.5 35.2,16.5 37.3,16.5 33.25,18.25 35.25,18.25 37.25,18.25
GNDE: C26.2 J2.SH | length 19.2
  Top Layer w0.3: C26.2 55.124,6.5 55.3,6.676 55.3,9.255 55.3,13.25 55.8,13.75 J2.SH@55.8,24.525
GNDU: C8.1 J1.Shell | length 13.6
  Top Layer w0.3: J1.Shell@11.025,11.03 11.025,7.735 ccw(c11.11,7.735) C8.1 ; J1.Shell@11.025,23.07 11.025,12.875 11.05,12.85
LED2: J2.12 U3.24 | length 57.3
  Top Layer w0.2: 31.4,20.3 31.875,19.825 31.877,19.827 U3.24
  Top Layer w0.3: 31.4,20.3 31.4,24.7 36.3,29.6 61.4,29.6 65.3,25.7 65.3,14.2 64.6,13.5 64.268,13.5 63.683,12.915 J2.12
LED3: J2.13 U3.33 | length 63.8
  Top Layer w0.2: 30.975,15.175 30.976,15.176 U3.33
  Top Layer w0.3: 30.975,15.175 27.925,15.175 27.923,15.176 26.95,14.203 26.95,11.225 30.15,8.025 30.15,3.85 31.35,2.65 54.45,2.65 61.572,9.772 61.572,19.407 J2.13
MDI_TR0_N: J2.3 U3.2 | length 14.3
  Top Layer w0.184: U3.2 38.885,14.176 cw(c38.885,14.015) 38.999,14.129 ccw(c39.113,14.243) 39.113,14.082 39.199,14.082 cw(c39.199,13.711) 39.462,13.973 39.952,13.483 40.746,12.689 ccw(c40.876,12.819) 40.827,12.642 41.013,12.591 ccw(c41.062,12.768) 41.058,12.584 cw(c41.057,12.429) 41.06,12.584 41.5,12.584 41.592,12.584 41.744,12.737 41.998,12.737 42.151,12.584 42.405,12.584 42.557,12.737 42.811,12.737 42.964,12.584 43.218,12.584 43.37,12.737 43.624,12.737 43.776,12.584 44.25,12.584 48.986,12.584 ccw(c48.986,12.768) 49.042,12.593 ; 49.042,12.593 cw(c49.46,11.28) 49.626,12.648 50.128,12.587 ; J2.3 50.382,12.898 cw(c50.252,12.768) 50.436,12.768 50.268,12.628 cw(c50.15,12.769) 50.129,12.587
MDI_TR0_P: J2.2 U3.1 | length 14.4
  Top Layer w0.184: U3.1 38.87,13.676 ccw(c38.87,13.838) 38.984,13.724 cw(c39.098,13.609) 39.098,13.771 39.128,13.771 cw(c39.128,13.538) 39.293,13.702 39.732,13.263 ccw(c39.952,13.483) 39.733,13.262 40.527,12.468 ccw(c40.876,12.819) 40.745,12.342 40.931,12.291 ccw(c41.062,12.768) 41.055,12.273 ccw(c41.06,12.584) 41.06,12.273 48.986,12.273 ccw(c48.986,12.768) 49.133,12.296 ccw(c49.088,12.445) 49.135,12.296 cw(c49.46,11.28) 49.589,12.339 50.091,12.278 ccw(c50.129,12.587) 50.095,12.278 ccw(c50.15,12.769) 50.103,12.277 50.131,12.274 ccw(c50.149,12.457) 50.146,12.273 ccw(c50.149,12.584) 50.149,12.273 ccw(c50.149,13.016) 50.674,12.491 ccw(c50.499,12.666) 50.747,12.666 cw(c50.93,12.666) 50.8,12.796 cw(c50.93,12.666) 50.93,12.85 51.277,12.85 cw(c51.277,11.828) J2.2
MDI_TR1_N: J2.7 U3.5 | length 21.2
  Top Layer w0.184: U3.5 38.885,15.676 cw(c38.885,15.515) 38.999,15.629 ccw(c39.113,15.743) 39.113,15.582 39.122,15.582 48.555,15.582 cw(c48.555,15.087) 48.84,15.491 cw(c48.751,15.364) 48.841,15.491 ccw(c49.46,16.36) 50.039,15.464 51.252,16.247 cw(c52,15.09) 51.604,16.41 52.118,16.564 cw(c52.26,16.09) 52.466,16.54 ; 52.467,16.54 cw(c52.337,16.257) 52.468,16.539 ccw(c52.545,16.706) 52.712,16.629 52.968,17.182 ccw(c52,17.63) 52.04,18.696 49.622,18.787 cw(c49.63,18.97) 49.52,18.823 cw(c49.63,18.97) 49.511,18.83 cw(c49.63,18.97) J2.7 ; J2.7 ccw(c50.324,18.9) 49.713,18.289 J2.7
MDI_TR1_P: J2.4 U3.4 | length 18.9
  Top Layer w0.184: U3.4 38.885,15.176 ccw(c38.885,15.338) 38.999,15.224 cw(c39.113,15.109) 39.113,15.271 ; 39.114,15.271 39.122,15.271 40.25,15.271 40.437,15.271 41.868,15.271 44.474,15.271 cw(c44.474,14.852) 44.893,14.852 44.893,14.461 ccw(c45.312,14.461) 45.312,14.042 ccw(c45.312,14.461) 45.731,14.461 45.731,14.852 cw(c46.15,14.852) 46.15,15.271 cw(c46.15,14.852) 46.569,14.852 46.569,14.461 ccw(c46.988,14.461) 46.988,14.042 ccw(c46.988,14.461) 47.407,14.461 47.407,14.852 cw(c47.826,14.852) 47.826,15.271 48.555,15.271 48.662,15.237 ; 48.662,15.236 48.875,15.112 ccw(c49.46,16.36) 48.967,15.073 ccw(c49.46,16.36) 49.041,15.047 ccw(c49.46,16.36) 50.207,15.203 51.421,15.986 cw(c52,15.09) 51.693,16.112 52.207,16.266 cw(c52.26,16.09) 52.337,16.257 ; J2.4 52.427,16.013 ccw(c52.26,16.09) 52.337,16.257
MDI_TR2_N: J2.6 U3.8 | length 13.7
  Top Layer w0.184: U3.8 38.885,17.176 cw(c38.885,17.015) 38.999,17.129 ccw(c39.113,17.243) 39.113,17.082 47.586,17.082 ccw(c47.586,18.357) 48.488,17.455 cw(c49.39,16.553) 49.39,17.829 50.238,17.829 cw(c50.238,17.489) 50.478,17.729 ccw(c50.719,17.97) 50.719,17.63 J2.6
MDI_TR2_P: J2.5 U3.7 | length 14.1
  Top Layer w0.184: U3.7 38.885,16.676 ccw(c38.885,16.838) 38.999,16.724 cw(c39.113,16.609) 39.113,16.771 43.564,16.771 43.656,16.771 43.91,16.517 44.164,16.517 44.418,16.771 44.672,16.771 44.926,16.517 45.18,16.517 45.434,16.771 45.688,16.771 45.942,16.517 46.196,16.517 46.45,16.771 47.064,16.771 47.715,16.771 ccw(c47.715,18.046) 48.617,17.144 cw(c49.519,16.242) 49.519,17.518 50.174,17.518 cw(c50.174,17.334) 50.304,17.464 cw(c50.174,17.334) 50.358,17.334 cw(c50.174,17.334) 50.304,17.204 J2.5
MDI_TR3_N: J2.9 U3.11 | length 14.4
  Top Layer w0.184: U3.11 38.885,18.676 cw(c38.885,18.515) 38.999,18.629 ccw(c39.113,18.743) 39.113,18.582 47.904,18.582 ccw(c47.904,18.766) 48.087,18.781 ; 48.087,18.782 cw(c49.46,18.9) 49.603,20.27 50.232,20.205 ccw(c50.251,20.388) 50.381,20.257 50.382,20.258 ccw(c50.252,20.388) 50.436,20.388 ccw(c50.252,20.388) 50.382,20.518 J2.9
MDI_TR3_P: J2.8 U3.10 | length 14.8
  Top Layer w0.184: U3.10 38.885,18.176 ccw(c38.885,18.338) 38.999,18.224 cw(c39.113,18.109) 39.113,18.271 ; 39.114,18.271 43,18.271 47,18.271 47.904,18.271 ccw(c47.904,18.766) 48.397,18.806 ccw(c48.242,18.794) 48.397,18.808 cw(c49.46,18.9) 49.569,19.961 50.2,19.895 ccw(c50.251,20.388) 50.6,20.036 50.601,20.037 ccw(c50.382,20.258) 50.603,20.039 50.683,20.12 ccw(c50.531,20.273) 50.747,20.273 50.747,20.286 cw(c50.93,20.286) 50.8,20.416 cw(c50.93,20.286) 50.93,20.47 51.277,20.47 cw(c51.277,19.447) J2.8
NetJ2_11: J2.11 R7.2 | length 3.4
  Top Layer w0.3: R7.2 63.075,7.225 63.075,10.2 J2.11
NetJ2_14: J2.14 R8.2 | length 2.8
  Top Layer w0.3: R8.2 62.65,24.658 63.25,24.058 J2.14
REF_FILT: C29.2 U3.48 | length 3.4
  Top Layer w0.2: U3.48 38.35,13.025
  Top Layer w0.3: 38.35,13.025 38.825,13.025 39.8,12.05 C29.2
REF_REXT: R9.2 U3.47 | length 2.9
  Top Layer w0.2: U3.47 37.45,12.7 37.468,12.682 37.505,12.682 37.818,12.37 38.105,12.37 38.8,11.675
  Top Layer w0.3: R9.2 38.8,11.675
RESET: R1.1 U3.35 | length 2.1
  Top Layer w0.2: 30.894,14.176 U3.35
  Top Layer w0.3: R1.1 29.95,13.575 30.1,13.725 30.443,13.725 30.894,14.176
SW: L1.1 U1.3 | length 2.5
  Top Layer w0.3: U1.3 27.626,8.5 L1.1
TEST: R4.2 U3.34 | length 2
  Top Layer w0.2: 30.823,14.676 U3.34
  Top Layer w0.3: R4.2 30.079,14.554 30.7,14.554 30.823,14.676
USB3_RX_N: J1.8 U2.8 U3.32 | length 24.3
  Top Layer w0.15: J1.8 cw(c16.999,14.55) 16.999,13.813 16.8,13.813 ccw(c16.8,12.711) 15.698,12.711 15.698,11.7 ccw(c16.5,11.7) 16.5,10.898 17.725,10.898 ccw(c17.725,12.725) 19.552,12.725 19.552,13.75 cw(c21.458,13.75) 21.458,15.656 U2.8@22.181,15.656 ; U2.8 U2.8@22.025,15.663 ; U2.8@22.046,15.6 ccw(c22.046,15.79) U2.8@22.181,15.656 ; U3.32 ccw(c31.687,15.676) 31.687,15.788 25.506,15.788 ccw(c25.506,15.658) 25.414,15.75 cw(c25.322,15.842) 25.322,15.712 23.73,15.712 23.73,15.7 cw(c23.575,15.7) 23.575,15.545 23.075,15.545 cw(c23.075,15.7) 22.92,15.7 22.92,15.712 22.315,15.712 ccw(c22.315,15.521) U2.8@22.181,15.656
USB3_RX_P: J1.9 U2.7 U3.31 | length 23.4
  Top Layer w0.15: J1.9 ccw(c16.999,12.8) 16.999,13.536 16.8,13.536 ccw(c16.8,12.711) 15.975,12.711 15.975,11.7 ccw(c16.5,11.7) 16.5,11.175 17.725,11.175 ccw(c17.725,12.725) 19.275,12.725 19.275,13.75 cw(c21.514,13.75) 21.514,15.988 U2.7@22.201,15.988 ; U2.7@22.025,16.037 U2.7 ; U2.7@22.181,16.044 ccw(c22.315,16.179) 22.315,15.988 22.92,15.988 22.92,16 cw(c23.075,16) 23.075,16.155 23.575,16.155 cw(c23.575,16) 23.73,16 23.73,15.988 25.207,15.988 ccw(c25.207,16.119) 25.299,16.027 cw(c25.391,15.935) 25.391,16.065 31.687,16.065 ccw(c31.687,16.176) U3.31
USB3_TX_C_N: C32.1 U3.28 | length 5.5
  Top Layer w0.15: C32.1@26.35,17.565 31.331,17.565 31.443,17.676 U3.28
USB3_TX_C_P: C31.1 U3.29 | length 5.5
  Top Layer w0.15: C31.1@26.35,17.288 31.331,17.288 31.443,17.176 U3.29
USB3_TX_N: C32.2 J1.5 U2.4 | length 11.1
  Top Layer w0.15: J1.5@18.08,20.955 J1.5 17.735,21.017 ccw(c18.225,21.017) 18.225,20.527 18.823,20.527 cw(c18.823,19.175) 20.175,19.175 20.175,18.614 ccw(c21.3,18.614) 21.3,17.488 21.913,17.488 ccw(c21.913,17.6) U2.4 22.025,17.59 cw(c21.953,17.59) 22.004,17.538 22.025,17.538 22.2,17.539 22.43,17.538 22.75,17.538 cw(c22.75,17.111) 22.806,17.535 22.811,17.534 ccw(c22.831,17.683) 22.819,17.533 ccw(c22.831,17.683) 22.951,17.593 cw(c23.075,17.5) 23.075,17.655 23.498,17.655 23.639,17.655 23.756,17.538 25.039,17.538 25.051,17.55 25.175,17.55 25.365,17.74 ccw(c25.279,17.825) C32.2
USB3_TX_P: C31.2 J1.6 U2.5 | length 10.5
  Top Layer w0.15: J1.6 17.735,19.76 cw(c18.225,19.76) 18.225,20.25 18.823,20.25 cw(c18.823,19.175) 19.898,19.175 19.898,18.614 ccw(c21.3,18.614) 21.3,17.211 21.913,17.211 cw(c21.913,17.1) U2.5 ; U2.5@22.037,17.1 22.082,17.144 22.911,17.144 23.011,17.045 23.075,17.045 23.639,17.045 23.856,17.261 25.039,17.261 25.051,17.25 25.175,17.25 25.365,17.06 cw(c25.279,16.975) C31.2
USB_D_N: J1.2 U2.2 U3.27 | length 24.7
  Top Layer w0.15: J1.2 cw(c15.735,19.161) 14.874,19.161 14.874,20.335 cw(c17.414,20.335) 17.414,22.875 18.535,22.875 19.05,22.873 cw(c19.05,20.9) 21.023,20.9 21.023,18.988 ccw(c21.3,18.988) 21.3,18.711 21.913,18.711 cw(c21.913,18.6) U2.2 ; U2.2@22.046,18.6 ccw(c22.046,18.79) 22.181,18.656 cw(c22.315,18.521) 22.315,18.712 ccw(c22.315,18.989) 22.317,18.712 ccw(c22.315,19.139) 22.595,18.816 22.96,19.132 cw(c23.075,19) 23.075,19.175 23.575,19.175 cw(c23.575,19) 23.709,19.113 23.916,18.865 ccw(c24.243,19.139) 24.08,18.744 cw(c24.022,18.606) 24.123,18.717 24.129,18.712 cw(c24.129,18.641) 24.179,18.691 ccw(c24.229,18.741) 24.229,18.67 26.228,18.67 26.231,18.667 26.535,18.667
  Top Layer w0.156: 26.535,18.667 cw(c26.535,18.014) 26.996,18.476 ccw(c27.457,18.937) 27.457,18.285 31.256,18.285 cw(c31.256,18.1) 31.387,18.23 ccw(c31.518,18.361) 31.518,18.176 U3.27
USB_D_P: J1.3 U2.1 U3.26 | length 25.1
  Top Layer w0.15: J1.3 ccw(c13.735,19.161) 14.597,19.161 14.597,20.335 cw(c17.414,20.335) 17.414,23.152 18.65,23.152 18.65,23.15 19.05,23.15 cw(c19.05,20.9) 21.3,20.9 21.3,18.988 21.913,18.988 ccw(c21.913,19.1) U2.1 ; U2.1@22.046,19.1 cw(c22.046,18.91) 22.181,19.044 ccw(c22.315,19.179) 22.315,18.989 ccw(c22.315,19.139) 22.414,19.025 22.779,19.342 cw(c23.075,19) 23.075,19.452 23.575,19.452 cw(c23.575,19) 23.922,19.29 24.128,19.042 ccw(c24.243,19.139) 24.186,19 ; 24.187,19 ccw(c24.243,19.139) 24.243,18.989 cw(c24.243,18.918) 24.294,18.968 ccw(c24.344,19.018) 24.344,18.947 26.342,18.947 26.345,18.95 26.652,18.95
  Top Layer w0.156: 26.652,18.95 cw(c26.652,18.297) 27.113,18.759 ccw(c27.575,19.22) 27.575,18.568 31.256,18.568 ccw(c31.256,18.753) 31.387,18.622 cw(c31.518,18.491) 31.518,18.676 U3.26
USBRBIAS: R5.2 U3.37 | length 1.7
  Top Layer w0.2: 32.45,12.45 U3.37
  Top Layer w0.3: R5.2 32.2,12.2 32.45,12.45
VBUS: C1.2 FB1.1 J1.1 | length 15.2
  Top Layer w0.4: J1.1 14,14.065 14,11 15,10 19,10 20.052,11.052 20.101,11.052 20.724,11.676 FB1.1 20.888,11.663 22.562,11.663 C1.2
VBUSDET: R6.2 U3.23 | length 2.1
  Top Layer w0.2: 32.92,20.58 32.95,20.55 U3.23
  Top Layer w0.3: R6.2 32.6,21.6 32.6,20.9 32.92,20.58
VBUSF: C2.2 C3.2 FB1.2 U1.1 U1.4 | length 8.2
  Top Layer w0.6: FB1.2@20.888,10.237 FB1.2 C3.2 20.968,8.5 U1.4 22.925,8.5 24,7.425 24,7.2 24.6,6.6 U1.1 ; FB1.2@21.353,10.237 22.575,10.237 C2.2
VCC: C30.2 J2.1 R10.1 | length 3.7
  Top Layer w0.3: R10.1 46.912,9.912 46.912,10.887 C30.2 46.925,10.94 47.075,11.09 49.27,11.09 J2.1
VDD12_SW_OUT: L2.1 U3.13 | length 3.1
  Top Layer w0.2: U3.13 39.111,19.827
  Top Layer w0.3: 39.111,19.827 39.482,20.198 39.482,21.456 L2.1
XI: C27.2 U3.40 Y1.1 | length 14.7
  Top Layer w0.2: 33.95,12.2 U3.40
  Top Layer w0.3: 33.95,12.2 33.95,8.1 33.575,7.725 31.076,7.725 30.9,7.549 30.9,4.326 31.076,4.15 C27.2 34.025,4.15 Y1.1
XO: C28.2 U3.41 Y1.3 | length 10.6
  Top Layer w0.2: 34.45,12.325 U3.41
  Top Layer w0.3: 34.45,12.325 34.45,8.125 34.875,7.7 36.049,7.7 36.225,7.524 36.225,5.85 Y1.3 36.325,5.75 C28.2@38.175,5.75
pads on no net: J2.MH U2.10 U2.11 U2.12 U2.14 U2.16 U2.18 U2.19 U2.20 U2.21 U3.16 U3.17 U3.18 U3.19 U3.22 U3.38 U3.43

## Polygon pours and split planes (outlines as drawn)
GND on Bottom Layer "GND_Bottom" (solid, remove dead copper, pour order 31): 0,4 0,30 cw(c4,30) 4,34 66,34 cw(c66,30) 70,30 70,4 cw(c66,4) 66,0 4,0 cw(c4,4)
+2V5 on Bottom Layer "+2V5_L04_P013" (solid, pour order 13): 36.525,11.15 36.45,11.225 36.45,12.325 36.425,12.35 36.425,13.575 36.625,13.775 36.625,19.225 37.075,19.675 40.375,19.675 41.375,18.675 41.375,12.95 40.85,12.425 37.375,12.425 37.275,12.325 37.275,11.375 37.05,11.15
+1V2 on Bottom Layer "+1V2_L04_P022" (solid, pour order 22): 33.475,20.05 41.6,20.05 42.15,20.6 42.15,24.625 41.575,25.2 41.475,25.1 38.925,25.1 38.725,24.9 38.725,20.875 38.7,20.875 38.425,20.6 36.875,20.6 36.875,21.25 36.6,21.525 36,21.525 35.8,21.325 35.8,20.7 35.525,20.425 33.85,20.425
+3V3 on Bottom Layer "+3V3_L04_P029" (solid, pour order 29): 59.921,6.075 59.921,7.321 60.55,7.95 60.55,26.65 60.775,26.875 61.85,26.875 62.075,26.65 62.075,24.342 62.075,23.7 62.075,21.7 62.075,8.2 62.45,7.825 62.45,6.275 62.25,6.075
+3V3 on Bottom Layer "+3V3_L04_P008" (solid, pour order 8): 25.425,12.525 25.425,19.6 31.3,25.475 31.3,22.725 28.35,19.775 28.35,12.488
+1V2 on Bottom Layer "+1V2_L04_P025" (solid, pour order 25): 41.831,24.944 39.975,26.8 31.15,26.8 28.925,24.575 28.925,21.675 29.1,21.675 32.175,24.75 38.35,24.75 38.825,24.275 38.825,23.796
+3V3 on Bottom Layer "+3V3_L04_P030" (solid, pour order 30): 31.675,10.652 31.675,9.8 30.337,8.463 28.8,10 28.8,11.315
+3V3 on Bottom Layer "+3V3_L04_P028" (solid, pour order 28): 44.8,8.925 42.425,11.3 44.35,10.975
+3V3 on Bottom Layer "+3V3_L04_P027" (solid, pour order 27): 28.325,15.9 30.4,13.825 30.575,13.825 30.575,13.6 30.55,13.575 30.45,13.675 28.3,13.675
+1V2 on Bottom Layer "+1V2_L04_P020" (solid, pour order 20): 35.45,11.65 34.7,11.65 33.325,13.025 31.775,13.025 28.75,16.05 28.75,19.475 31.5,22.225 34.3,22.225 34.3,20.75 33.6,20.05 30.3,20.05 29.55,19.3 29.55,16.625 30.85,15.325 32.712,13.462 33.875,13.525 34.9,12.5 35.325,12.5 35.45,12.375
+1V2A on Bottom Layer "+1V2A_L04_P024" (solid, pour order 24): 30.15,16.574 32.925,13.8 34.025,13.8 34.2,13.625 34.375,13.625 34.375,14.3 32.1,16.575
+1V2 on Bottom Layer "+1V2_L04_P023" (solid, pour order 23): 34.3,20.75 34.625,20.425 33.85,20.425
+3V3 on Bottom Layer "+3V3_L04_P021" (solid, pour order 21): 29.375,15.95 29.375,14.425 30.05,13.75 29.325,13.75
+3V3 on Bottom Layer "+3V3_L04_P019" (solid, pour order 19): 21.95,4.35 21.95,2.925 22.35,2.525 29.7,2.525 30.894,3.719 30.894,10.2 30.9,10.2 31.4,10.7 31.4,12.825 30.475,13.75 26.475,13.75 25.425,12.7 25.425,5.125 24.875,4.575 22.175,4.575
+3V3 on Bottom Layer "+3V3_L04_P017" (solid, pour order 17): 31.183,25.357 31.3,22.725 34.5,22.725 34.5,20.925 34.725,20.7 35.325,20.7 35.475,20.85 35.475,21.525 35.7,21.75 36.775,21.75 37,21.525 37.7,20.825 38.025,20.825 38.275,21.075 38.25,21.1 38.25,24.025 36.918,25.357
+3V3 on Bottom Layer "+3V3_L04_P016" (solid, pour order 16): 31.183,24.183 31.183,25.425 33.175,25.425 33.675,24.925 31.241,22.491
+1V2A on Bottom Layer "+1V2A_L04_P009" (solid, pour order 9): 36.325,11.275 36.2,11.15 35.775,11.15 35.775,11.175 35.65,11.3 35.65,12.125 35.65,13 35,13 31.768,16.232 30.129,16.479 30.129,19.404 30.475,19.75 35.8,19.75 36.35,19.2 36.35,13.775 36.325,13.75 36.325,12.15
+3V3 on Bottom Layer "+3V3_L04_P011" (solid, pour order 11): 60.346,6.05 60.321,6.075 47.646,6.075 44.375,9.346 44.375,10.2 39.521,10.2 39.496,10.175 39.471,10.2 38.896,10.2 38.896,10.8 39.396,11.3 44.446,11.3 48.146,7.6 48.446,7.3 59.921,7.3
+3V3 on Bottom Layer "+3V3_L04_P006" (solid, pour order 6): 31.402,12.825 33.1,12.825 34.4,11.525 34.925,11 37.525,11 37.525,12.125 37.6,12.2 39.1,12.2 39.4,11.9 39.4,10.7 38.9,10.2 30.894,10.2
GND on Top Layer "GND_TOP" (solid, pour order 2): 0,4 0,30 cw(c4,30) 4,34 66,34 cw(c66,30) 70,30 70,4 cw(c66,4) 66,0 4,0 cw(c4,4)
GND on GND_2 (split plane): 66.249,33.483 66.497,33.456 66.742,33.412 66.984,33.35 67.22,33.272 67.45,33.176 67.673,33.065 67.888,32.937 68.092,32.795 68.287,32.639 68.469,32.469 68.639,32.287 68.795,32.092 68.937,31.888 69.065,31.673 69.176,31.45 69.272,31.22 69.35,30.984 69.412,30.742 69.456,30.497 69.483,30.249 69.491,30.016 69.49,30 69.49,4 69.491,3.984 69.483,3.751 69.456,3.503 69.412,3.258 69.35,3.016 69.272,2.78 69.176,2.55 69.065,2.327 68.937,2.112 68.795,1.908 68.639,1.713 68.469,1.531 68.287,1.361 68.092,1.205 67.888,1.063 67.673,0.935 67.45,0.824 67.22,0.728 66.984,0.65 66.742,0.588 66.497,0.544 66.249,0.517 66.016,0.509 66,0.51 4,0.51 3.984,0.509 3.751,0.517 3.503,0.544 3.258,0.588 3.016,0.65 2.78,0.728 2.55,0.824 2.327,0.935 2.112,1.063 1.908,1.205 1.713,1.361 1.531,1.531 1.361,1.713 1.205,1.908 1.063,2.112 0.935,2.327 0.824,2.55 0.728,2.78 0.65,3.016 0.588,3.258 0.544,3.503 0.517,3.751 0.509,3.984 0.51,4 0.51,30 0.509,30.016 0.517,30.249 0.544,30.497 0.588,30.742 0.65,30.984 0.728,31.22 0.824,31.45 0.935,31.673 1.063,31.888 1.205,32.092 1.361,32.287 1.531,32.469 1.713,32.639 1.908,32.795 2.112,32.937 2.327,33.065 2.55,33.176 2.78,33.272 3.016,33.35 3.258,33.412 3.503,33.456 3.751,33.483 3.984,33.491 4,33.49 66,33.49 66.016,33.491
GND on GND_1 (split plane): 66.249,33.483 66.497,33.456 66.742,33.412 66.984,33.35 67.22,33.272 67.45,33.176 67.673,33.065 67.888,32.937 68.092,32.795 68.287,32.639 68.469,32.469 68.639,32.287 68.795,32.092 68.937,31.888 69.065,31.673 69.176,31.45 69.272,31.22 69.35,30.984 69.412,30.742 69.456,30.497 69.483,30.249 69.491,30.016 69.49,30 69.49,4 69.491,3.984 69.483,3.751 69.456,3.503 69.412,3.258 69.35,3.016 69.272,2.78 69.176,2.55 69.065,2.327 68.937,2.112 68.795,1.908 68.639,1.713 68.469,1.531 68.287,1.361 68.092,1.205 67.888,1.063 67.673,0.935 67.45,0.824 67.22,0.728 66.984,0.65 66.742,0.588 66.497,0.544 66.249,0.517 66.016,0.509 66,0.51 4,0.51 3.984,0.509 3.751,0.517 3.503,0.544 3.258,0.588 3.016,0.65 2.78,0.728 2.55,0.824 2.327,0.935 2.112,1.063 1.908,1.205 1.713,1.361 1.531,1.531 1.361,1.713 1.205,1.908 1.063,2.112 0.935,2.327 0.824,2.55 0.728,2.78 0.65,3.016 0.588,3.258 0.544,3.503 0.517,3.751 0.509,3.984 0.51,4 0.51,30 0.509,30.016 0.517,30.249 0.544,30.497 0.588,30.742 0.65,30.984 0.728,31.22 0.824,31.45 0.935,31.673 1.063,31.888 1.205,32.092 1.361,32.287 1.531,32.469 1.713,32.639 1.908,32.795 2.112,32.937 2.327,33.065 2.55,33.176 2.78,33.272 3.016,33.35 3.258,33.412 3.503,33.456 3.751,33.483 3.984,33.491 4,33.49 66,33.49 66.016,33.491

## Silkscreen, mask and mechanical layers (free items; w line width, h text height)
Top Overlay:
  drawing of 60 lines, arcs and shapes, not listed
Bottom Overlay:
  drawing of 56 lines, arcs and shapes, not listed
Mechanical 1:
  the board outline again, w0.1

## Text inside footprints (layer, text, board x,y; h text height)
J2: Top 3D Body "1" at 48.85,9.667 h1 r270